# Altium PCB demo_dermis_main_testboard_scratch.PcbDoc (part 4 of 7)
Units mm, origin at the board's own origin, x right, y up, seen from the top; angles counter-clockwise.
Board outline 348.67 x 247.5 mm, 4 copper layers (Top Layer, Layer 1, Layer 2, Bottom Layer), stack 0.603 mm thick; 416 components, 288 nets, 1934 pads, 1690 vias.
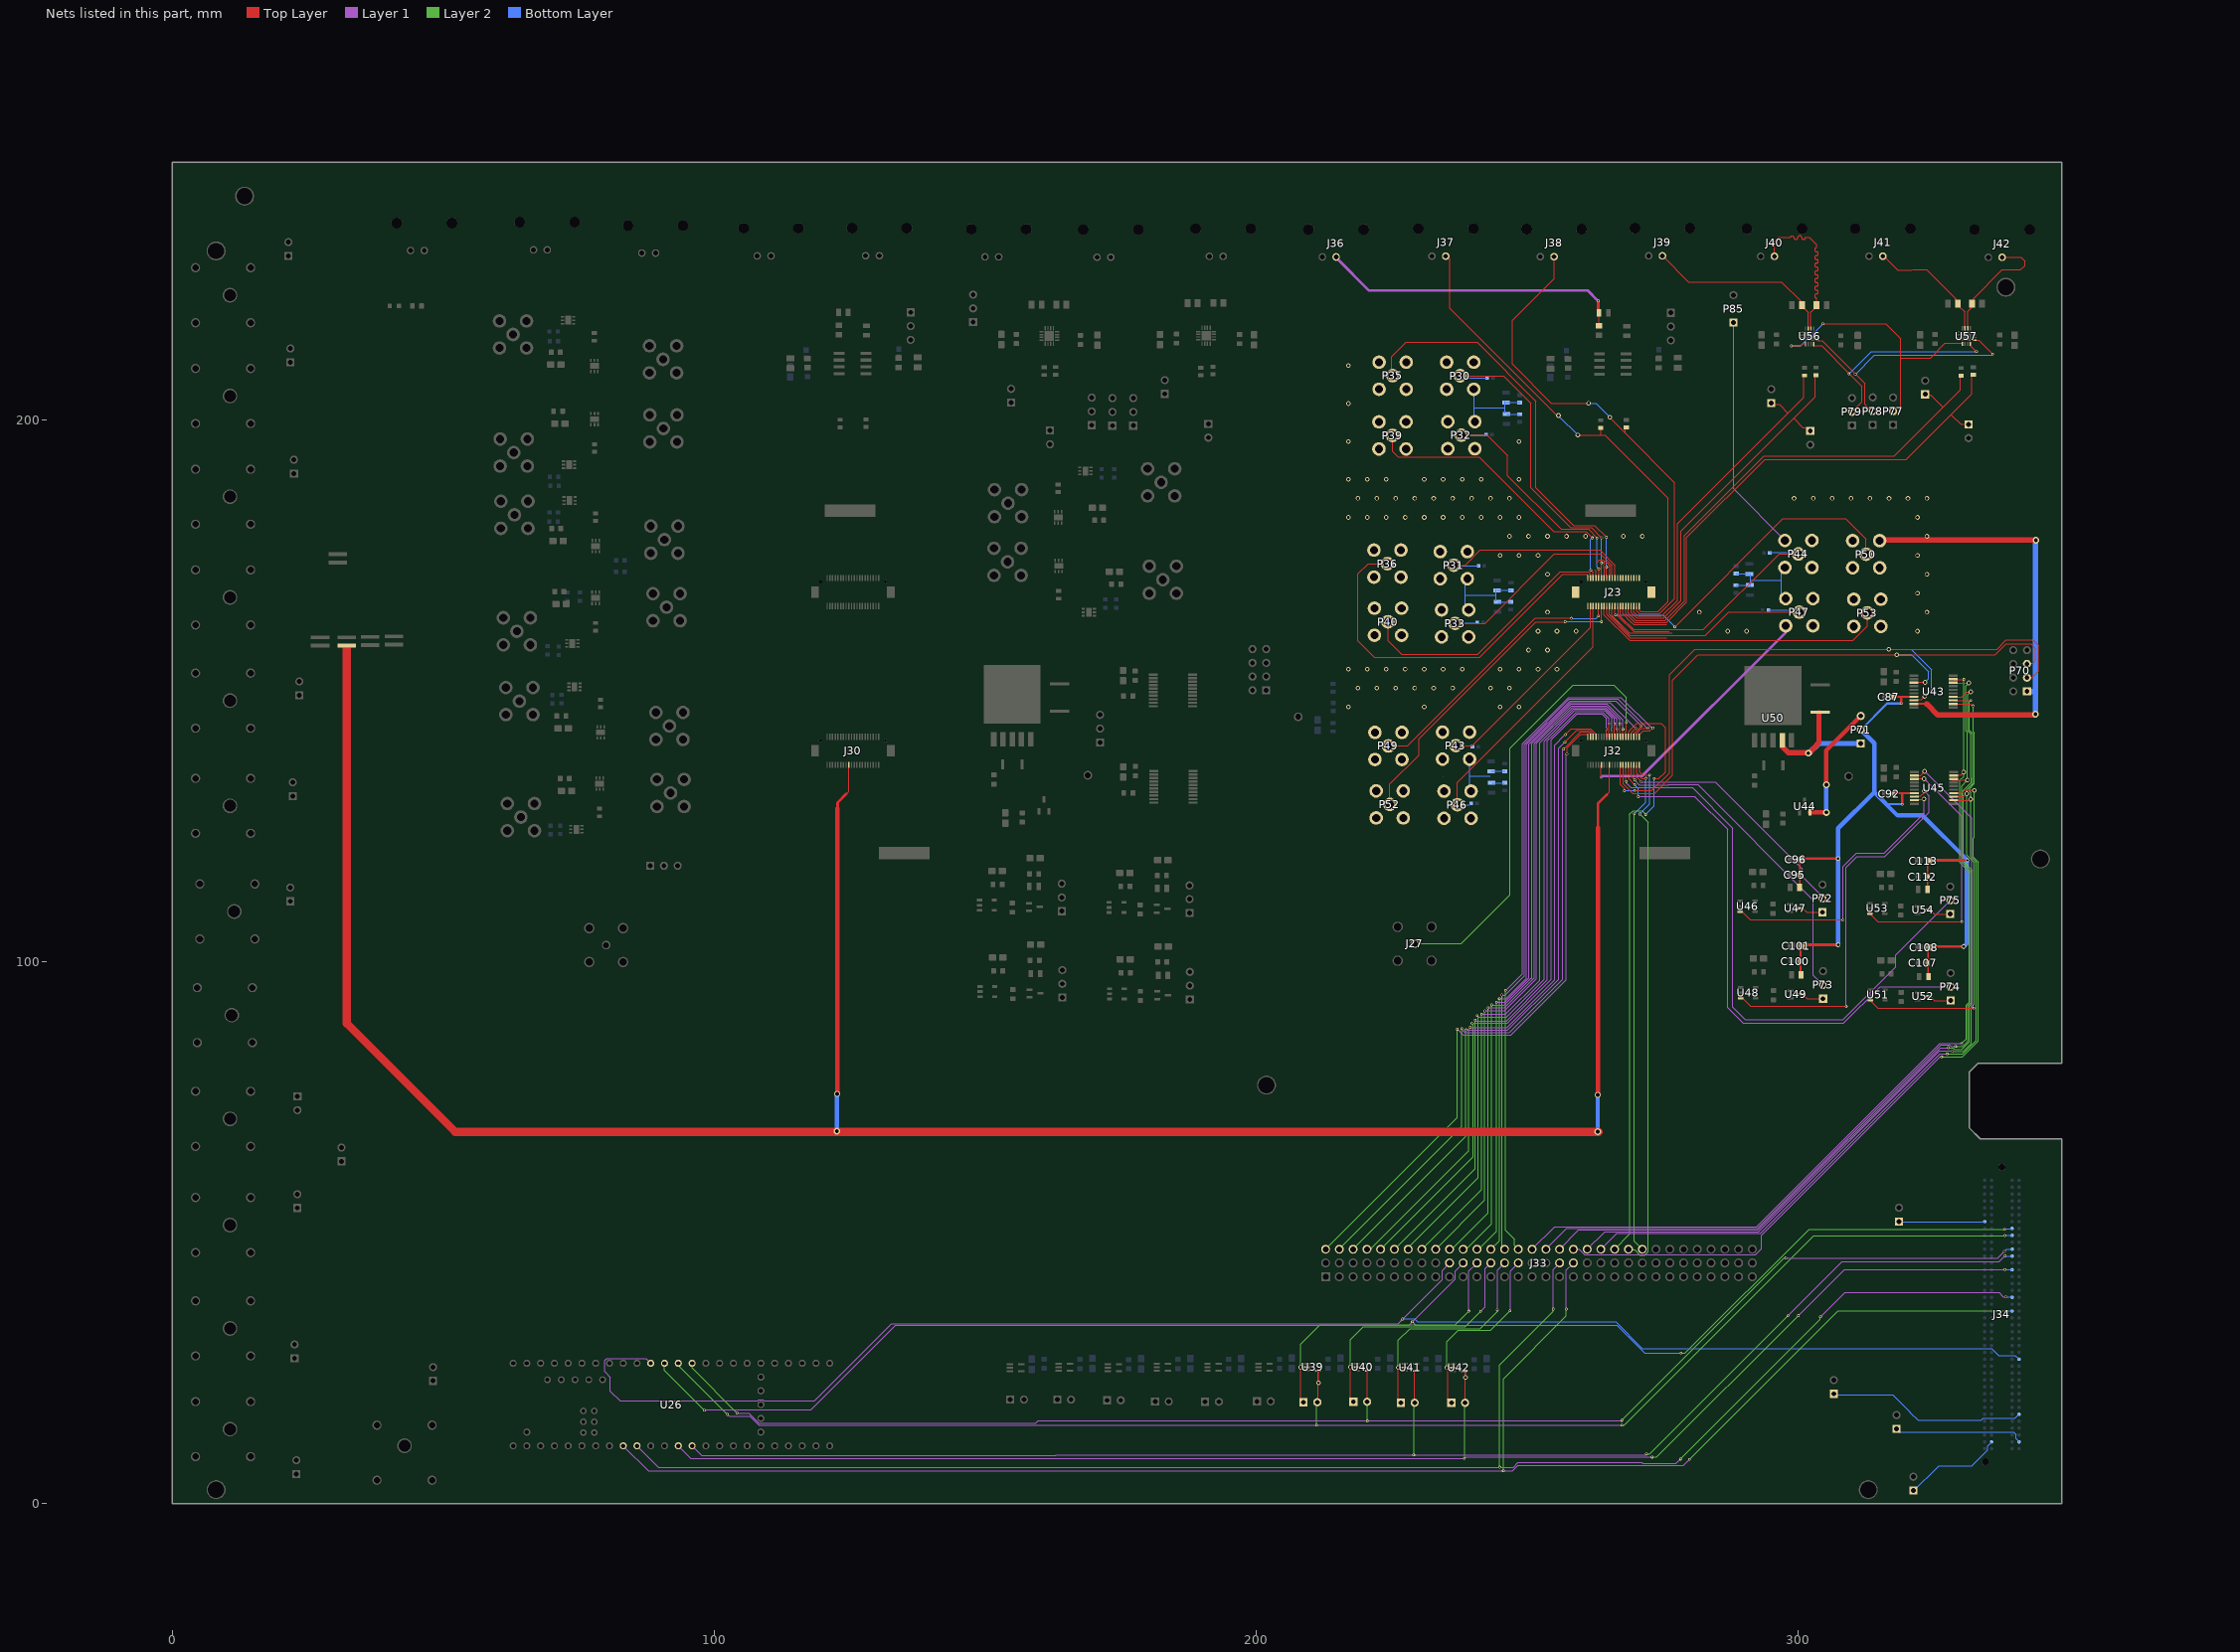
[diagram p5: the nets of this part, all layers, seen from the top]

## Via types
v1: diameter 0.85, hole 0.5, Top Layer to Bottom Layer, 1036 vias
v2: diameter 0.5, hole 0.3, Top Layer to Bottom Layer, 455 vias
v3: diameter 1.27, hole 0.711, Top Layer to Bottom Layer, 133 vias
v4: diameter 0.7, hole 0.4, Top Layer to Bottom Layer, 26 vias
v5: diameter 0.4, hole 0.25, Top Layer to Bottom Layer, 24 vias
v6: diameter 1.1, hole 0.7, Top Layer to Bottom Layer, 16 vias

## Nets (pads, with @x,y where several pads share a name; then routed paths per layer and width w, separated by ;. In a path a pad name is that pad's centre, name@x,y a point inside that pad or via, vN(x,y) a via of type N, cw(c..) or ccw(c..) an arc to the next point about the centre after c; other vN are vias at no path point) (continued)
CHIPB_A0: P79.2 U56.4 U57.4 | length 44.8
  Top Layer w0.2: U56.4@302.856,213.948 302.856,213.668 302.883,213.641 304.286,213.641 309.418,208.509 309.512,208.415 311.777,206.15 311.777,203.326 P79.2@309.929,201.478 ; U57.4@331.752,214.007 331.752,213.727 v2(332.896,212.583)
  Bottom Layer w0.2: v2(309.399,208.489) 309.64,208.73 313.492,212.583 v2(332.896,212.583)
CHIPB_A1: P78.2 U56.5 U57.5 | length 49.4
  Top Layer w0.2: U56.5@303.554,214.645 304.401,214.645 312.288,206.758 312.288,202.834 P78.2@313.74,201.383 ; U57.5@332.449,214.704 333.297,214.704 v2(335.877,212.124)
  Bottom Layer w0.2: v2(310.533,208.408) 314.029,211.904 335.657,211.904 v2(335.877,212.124)
CHIPB_A2: P77.2 U56.1 U57.1 | length 53
  Top Layer w0.2: v2(298.745,213.645) 300.558,213.645 300.926,214.012 301.356,214.012 U56.1@301.356,213.948 ; v2(304.564,217.706) 316.12,217.706 318.883,214.943 318.883,201.651 318.641,201.408 317.61,201.408 P77.2@317.591,201.389 ; 318.952,211.413 324.433,211.413 327.118,214.098 330.224,214.098 330.251,214.071 U57.1@330.251,214.007
  Bottom Layer w0.2: v2(298.745,213.645) 300.498,213.645 304.018,217.165 304.022,217.165 v2(304.564,217.706)
CHIPB_ACK: J32.37 J33.6 | length 122.2
  Top Layer w0.15: v2(256.735,139.25) 259.881,142.397 261.299,142.397 J32.37@261.73,141.966
  Layer 1 w0.15: v2(237.934,87.692) 237.934,87.598 238.175,87.357 238.175,87.204 238.482,86.896 246.68,86.896 246.819,87.036 256.577,96.793 256.577,139.133 v2@256.622,139.178
  Layer 2 w0.15: J33.6@215.344,46.943 215.344,47.008 237.934,69.598 v2(237.934,87.692)
CHIPB_ADDRX0: J32.25 J33.15 | length 127.2
  Top Layer w0.15: v5@264.632,142.912 264.632,141.39 J32.25@264.669,141.48
  Layer 1 w0.15: v2(239.829,88.642) 246.392,88.642 254.455,96.705 254.455,140.99 259.188,145.724 263.828,145.724 264.645,144.906 264.645,142.927 v5(264.647,142.927)
  Layer 2 w0.15: J33.15@222.964,46.943 240.029,64.007 240.029,88.443 v2(239.829,88.642)
CHIPB_ADDRY0: J32.23 J33.18 | length 126.8
  Top Layer w0.15: v5@265.121,143.943 265.121,141.379 J32.23@265.169,141.48
  Layer 1 w0.15: v2(240.398,89.22) 240.555,89.071 246.145,89.071 253.71,96.635 253.71,140.73 254.108,141.128 254.108,141.134 254.311,141.337 254.317,141.337 259.004,146.024 264.013,146.024 265.121,144.917 v5(265.121,143.944)
  Layer 2 w0.15: J33.18@225.504,46.943 240.398,61.837 v2(240.398,89.22)
CHIPB_AER_DIS: J32.21 J33.21 | length 126.8
  Top Layer w0.15: v5@265.607,142.91 265.607,141.386 J32.21@265.669,141.48
  Layer 1 w0.15: v2(240.797,90.048) 241.062,89.782 246.163,89.782 253.143,96.762 253.143,140.721 258.746,146.324 264.224,146.324 265.597,144.951 v5(265.597,142.921)
  Layer 2 w0.15: J33.21@228.044,46.943 228.044,47.257 240.923,60.136 240.923,89.921 v2(240.797,90.048)
CHIPB_CLK: J27.1 J32.11 | length 83.1
  Top Layer w0.2: J32.11@268.169,141.48 268.118,141.375 268.118,142.37 268.277,142.53 v5(268.277,144.152)
  Layer 2 w0.15: J27.1@229.238,103.307 237.803,103.307 246.811,112.315 246.811,139.377 258.464,151.03 265.959,151.03 268.277,148.712 v5(268.277,144.152)
CHIPB_CSb_IDAC: J33.57 U45.14 | length 144.2
  Top Layer w0.2: U45.14@328.236,131.1 U45.14@328.719,131.1 330.109,131.1 330.729,131.72 332.365,131.72 v1(332.468,131.617)
  Layer 1 w0.15: J33.57@258.524,46.943 259.579,46.943 260.629,45.893 292.103,45.893 293.225,47.014 293.225,49.538 326.124,82.437 v2(326.462,82.437)
  Layer 2 w0.15: v2(326.462,82.437) 330.3,82.437 333.254,85.391 333.254,118.399 332.333,119.32 332.333,122.807 332.518,122.992 332.518,131.567 v1(332.468,131.617)
CHIPB_CSb_VDAC: J33.54 U43.14 | length 161.7
  Top Layer w0.2: U43.14@328.871,148.899 328.884,148.885 330.213,148.885 331.127,149.799 v1(331.826,149.799)
  Layer 1 w0.15: J33.54@255.984,46.943 259.526,50.485 292.601,50.485 326.244,84.128 v2(327.728,84.128)
  Layer 2 w0.15: v2(327.728,84.128) 328.513,84.128 328.812,83.828 330.216,83.828 331.606,85.219 331.606,91.755 332.166,92.315 332.166,116.8 330.46,118.506 330.46,130.655 330.41,130.705 330.41,131.515 331.932,133.037 331.932,133.819 331.811,133.94 331.811,142.087 331.31,142.587 331.31,149.283 v1(331.826,149.799)
CHIPB_CT_MODE: J32.15 J33.30 | length 125
  Top Layer w0.15: v5@267.118,143.858 267.118,141.375 J32.15@267.169,141.48
  Layer 1 w0.15: v2(242.799,91.474) 245.804,91.474 251.314,96.984 251.314,140.296 258.242,147.224 264.597,147.224 267.089,144.732 v5(267.089,143.886)
  Layer 2 w0.15: J33.30@235.664,46.943 236.089,46.943 242.799,53.653 v2(242.799,91.474)
CHIPB_DIG_RES0: J32.7 J33.36 | length 125.3
  Top Layer w0.15: J32.7@269.168,141.426 269.168,142.219 v5(270.047,143.099)
  Layer 1 w0.15: v2@244.232,92.55 245.854,92.55 250.289,96.985 250.289,140.12 258.018,147.849 265.297,147.849 v5(270.047,143.099)
  Layer 2 w0.15: J33.36@240.744,46.943 241.044,46.943 244.344,50.242 v2(244.344,92.542)
CHIPB_DIG_RES1: J32.5 J33.39 | length 125.6
  Top Layer w0.15: J32.5@269.667,141.426 269.667,142.047 v5@271.026,143.405
  Layer 1 w0.15: v2@244.845,93.075 244.98,93.21 246.09,93.21 249.848,96.967 249.848,140.109 257.887,148.149 266.381,148.149 v5(271.026,143.504)
  Layer 2 w0.15: J33.39@243.284,46.943 244.869,48.527 v2(244.869,93.181)
CHIPB_DIG_RES2: J32.3 J33.42 | length 126.8
  Top Layer w0.15: J32.3@270.118,141.894 270.118,142.073 271.073,143.029 272.259,143.029 v5(272.314,143.083)
  Layer 1 w0.15: v2(245.317,93.855) 245.89,93.855 249.464,97.429 249.464,140.149 257.763,148.449 266.752,148.449 272.118,143.083 v5(272.314,143.083)
  Layer 2 w0.15: v2(245.317,93.855) 245.317,93.475 245.394,93.399 245.394,92.964 245.317,92.887 245.317,47.449 J33.42@245.824,46.943
CHIPB_DIG_RES3: J32.1 J33.45 | length 128.8
  Top Layer w0.15: J32.1@270.617,141.826 271.362,142.57 272.623,142.57 v2(273.2,143.146)
  Layer 1 w0.15: v2@245.928,94.581 249.093,97.747 249.093,140.203 257.639,148.749 267.32,148.749 272.922,143.146 v2(273.2,143.146)
  Layer 2 w0.15: v2(245.998,94.706) 245.998,50.388 247.614,48.771 247.614,47.693 J33.45@248.364,46.943
CHIPB_GAIN_HI: J32.13 J33.33 | length 124.6
  Top Layer w0.15: J32.13@267.645,141.403 v2@267.645,142.852
  Layer 1 w0.15: v2@243.415,92.08 243.478,92.017 245.746,92.017 250.687,96.958 250.864,96.958 250.864,140.27 258.143,147.549 264.696,147.549 267.619,144.626 267.619,142.932 v2(267.672,142.879)
  Layer 2 w0.15: J33.33@238.204,46.943 238.746,46.943 243.415,51.612 v2(243.415,92.025)
CHIPB_IBIAS: J32.12 P75.2 | length 110.7
  Top Layer w0.2: v2@268.228,133.301 J32.12@268.228,136.123
  Layer 1 w0.2: v2(268.276,133.253) 268.276,133.004 269.113,132.167 269.492,132.167 269.518,132.141 270.135,132.141 270.161,132.167 280.439,132.167 280.442,132.148 287.92,124.671 287.92,91.635 290.202,89.353 308.244,89.353 317.963,99.072 317.963,101.235 P75.2@328.058,111.33
CHIPB_IBIAS_ADAPT: J32.10 P74.2 | length 103.4
  Top Layer w0.2: J32.10@268.702,136.148 268.702,133.789 v2@269.761,132.73
  Layer 1 w0.2: v2(270.49,130.46) 280.926,130.46 280.929,130.441 286.954,124.417 286.954,91.518 289.84,88.632 308.409,88.632 315.159,95.381 P74.2@328.123,95.381
  Bottom Layer w0.2: v2(269.826,132.691) 269.826,132.61 270.49,131.946 v2(270.49,130.46)
CHIPB_IBIAS_ADAPT_PRE: P74.1 U52.3 | length 4.4
  Top Layer w0.2: U52.3@324.071,93.618 324.414,93.618 325.192,92.841 P74.1@328.123,92.841
CHIPB_IBIAS_AFE: J32.8 P73.2 | length 61.5
  Top Layer w0.2: J32.8@269.203,136.148 269.203,134.224 v2(269.86,133.566)
  Layer 1 w0.2: v2(269.86,133.566) 269.86,133.498 270.711,132.647 276.063,132.647 276.113,132.698 281.465,132.698 281.468,132.679 302.801,111.346 302.801,97.507 P73.2@304.593,95.715
CHIPB_IBIAS_AFE_PRE: P73.1 U49.3 | length 4.4
  Top Layer w0.2: U49.3@300.541,93.952 300.884,93.952 301.662,93.175 P73.1@304.593,93.175
CHIPB_IBIAS_PRE: P75.1 U54.3 | length 4.4
  Top Layer w0.2: U54.3@324.006,109.568 324.349,109.568 325.126,108.79 P75.1@328.058,108.79
CHIPB_IBIAS_SLEW: J32.6 P72.2 | length 59.9
  Top Layer w0.2: J32.6@269.702,136.148 269.702,134.502 270.998,133.206 v2(270.998,133.197)
  Layer 1 w0.2: v2(270.998,133.197) 283.955,133.197 ; v2@271.001,133.179 284.715,133.179 300.753,117.141 300.753,115.688 304.493,111.948 P72.2@304.493,111.666
CHIPB_IBIAS_SLEW_PRE: P72.1 U47.3 | length 4.4
  Top Layer w0.2: U47.3@300.44,109.903 300.783,109.903 301.56,109.126 P72.1@304.493,109.126
CHIPB_LDACb: J33.51 U43.18 U45.18 | length 167.6
  Top Layer w0.2: U45.18@328.341,133.548 331.213,133.548 v1(331.232,133.529) ; U45.18@328.686,133.667 U45.18@328.719,133.7 ; U43.18@328.865,151.513 328.968,151.41 331.456,151.41 v1(331.49,151.444)
  Layer 1 w0.15: J33.51@253.444,46.943 257.286,50.785 292.477,50.785 326.344,84.653 327.945,84.653 328.245,84.353 v2(329.029,84.353)
  Layer 2 w0.15: v2(329.029,84.353) 329.054,84.329 330.363,84.329 331.306,85.272 331.306,91.879 331.866,92.439 331.866,116.676 330.16,118.382 330.16,132.427 331.232,133.499 331.232,142.242 330.901,142.572 330.901,150.855 v1(331.49,151.444)
CHIPB_RATIOMODE0: J32.19 J33.24 | length 125.7
  Top Layer w0.15: v5@266.072,143.87 266.072,141.421 J32.19@266.169,141.48
  Layer 1 w0.15: v2(241.6,90.307) 246.013,90.307 252.304,96.598 252.304,140.372 258.556,146.624 264.348,146.624 266.104,144.869 v5(266.104,143.902)
  Layer 2 w0.15: J33.24@230.584,46.943 241.6,57.958 v2(241.6,90.307)
CHIPB_RATIOMODE1: J32.17 J33.27 | length 125.1
  Top Layer w0.15: v5@266.618,142.872 266.618,141.375 J32.17@266.669,141.48
  Layer 1 w0.15: v2(242.203,90.933) 245.814,90.933 251.71,96.829 251.71,140.268 258.366,146.924 264.473,146.924 266.578,144.818 266.578,142.974 v5(266.547,142.942)
  Layer 2 w0.15: J33.27@233.124,46.943 242.181,55.999 v2@242.181,90.933
CHIPB_REQOFF: J32.33 J33.12 | length 121
  Top Layer w0.15: v2(257.037,141.917) 258.126,143.006 261.69,143.006 J32.33@262.73,141.966
  Layer 1 w0.15: v2(239.504,87.889) 246.319,87.889 246.53,88.099 255.062,96.632 255.062,139.982 v2@256.925,141.845
  Layer 2 w0.15: J33.12@220.424,46.943 221.079,46.943 239.251,65.115 239.251,87.542 239.504,87.794 v2(239.504,87.889)
CHIPB_REQON: J32.35 J33.9 | length 120.7
  Top Layer w0.15: v2(256.958,140.503) 259.152,142.696 261.499,142.696 J32.35@262.23,141.966
  Layer 1 w0.15: v2(238.7,87.421) 238.758,87.364 246.412,87.364 255.82,96.771 255.82,139.404 v2@256.846,140.431
  Layer 2 w0.15: J33.9@217.884,46.943 238.7,67.758 v2(238.7,87.421)
CHIPB_RESETb: J33.48 U43.19 U45.19 | length 167.9
  Top Layer w0.15: U43.19@328.614,152.135 328.675,152.135 328.725,152.085 v2(330.586,152.085)
  Top Layer w0.2: U45.19@328.719,134.35 328.835,134.465 329.989,134.465 v1(330.53,135.006)
  Layer 1 w0.15: J33.48@250.904,46.943 255.046,51.085 292.337,51.085 326.155,84.902 330.097,84.902 v2(330.145,84.854)
  Layer 2 w0.15: v2(330.145,84.854) 330.145,84.919 331.006,85.78 331.006,92.003 331.566,92.563 331.566,116.551 329.86,118.257 329.86,133.542 330.53,134.212 v1(330.53,135.006) 330.558,135.034 330.558,152.057 v2(330.586,152.085)
CHIPB_RST: J32.39 J33.3 | length 123
  Top Layer w0.15: v2@257.384,138.377 257.384,139.476 259.857,141.949 J32.39@261.24,141.949
  Layer 1 w0.15: v2(237.098,87.547) 238.161,86.484 247.014,86.484 257.227,96.697 v2@257.227,138.259
  Layer 2 w0.15: J33.3@212.804,46.943 237.098,71.236 v2(237.098,87.547)
  other v2: 257.339,138.331
CHIPB_SCLK: J33.60 U43.13 U45.13 | length 157.6
  Top Layer w0.2: U45.13@328.255,130.504 330.498,130.504 330.989,130.995 v1(331.11,130.995) ; U43.13@328.868,148.252 328.934,148.186 328.97,148.223 v2(331.852,148.223)
  Layer 1 w0.15: J33.60@261.064,46.943 264.306,50.185 292.726,50.185 326.049,83.509 328.372,83.509 v2(328.396,83.484)
  Layer 2 w0.15: v2(328.396,83.484) 330.485,83.484 331.906,84.906 331.906,91.63 332.466,92.19 332.466,118.338 331.11,119.694 v1(331.11,130.995) 331.11,131.79 332.232,132.912 332.232,142.09 331.61,142.711 331.61,147.982 v2(331.852,148.223)
CHIPB_SDI: J33.63 U43.12 U45.12 | length 155.4
  Top Layer w0.2: U43.12@328.614,147.585 328.614,147.685 328.751,147.548 331.759,147.548 332.084,147.223 v2(332.26,147.223) ; U45.12@328.719,129.8 328.55,129.8 328.554,129.796 331.369,129.796 331.563,129.99 v1(331.818,129.99)
  Layer 1 w0.15: J33.63@263.604,46.943 266.546,49.885 293.046,49.885 326.144,82.984 v2(327.475,82.984)
  Layer 2 w0.15: v2(327.475,82.984) 327.499,82.959 330.384,82.959 332.856,85.432 332.856,118.372 331.818,119.411 v1(331.818,129.99) 331.818,131.277 331.674,131.421 331.674,132 332.532,132.858 332.532,142.143 332.26,142.415 v2(332.26,147.223)
CHIPB_VBIAS: U45.3 U53.3 | length 49
  Top Layer w0.15: U45.3@321.455,133.7 321.512,133.757 v1(323.241,133.757)
  Top Layer w0.2: U53.3@312.868,108.943 313.1,108.943 314.661,107.383 v2(330.189,107.383)
  Layer 1 w0.2: v1(323.241,133.757) 330.189,126.809 v2(330.189,107.383)
CHIPB_VBIAS_2P5V: C87.1 C92.1 C95.1 C96.1 C100.1 C101.1 C107.1 C108.1 C112.1 C113.1 P71.2 R30.1 R31.1 R33.1 R34.1 U43.7 U45.7 | length 156.4
  Top Layer w0.3: R30.1@300.326,114.221 300.326,118.727 C96.1@300.36,118.788 ; R31.1@300.427,97.769 C101.1@300.427,102.776 ; R34.1@323.891,113.886 323.891,118.392 C113.1@323.926,118.453 ; R33.1@323.957,97.259 C108.1@323.957,102.442
  Top Layer w0.4: C87.1@317.594,148.852 317.594,148.9 319.029,148.9 ; C92.1@317.66,131.1 319.194,131.1 ; v2(319.021,147.634) 319.021,148.893 319.029,148.9 ; v2(319.194,129.056) 319.194,131.1 ; U45.7@321.455,131.1 319.194,131.1 ; U43.7@321.605,148.9 319.029,148.9
  Top Layer w0.5: C96.1@300.36,118.788 300.643,119.071 300.675,119.038 300.701,119.013 v1(307.364,119.013) ; C101.1@300.461,102.837 300.591,102.967 300.744,103.119 300.75,103.113 v1(307.386,103.113) ; C113.1@323.926,118.453 324.208,118.736 324.215,118.729 331.156,118.729 v4(331.195,118.69) ; C108.1@323.991,102.503 324.121,102.634 324.274,102.786 324.28,102.78 324.283,102.777 v1(330.525,102.777)
  Bottom Layer w0.4: P71.2@311.555,142.809 316.38,147.634 v2(319.021,147.634) ; 314.036,131.509 316.489,129.056 v2(319.194,129.056)
  Bottom Layer w0.8: v1@307.361,103.064 307.361,124.621 314.036,131.296 ; P71.2@311.555,142.809 314.036,140.328 314.036,131.509 314.036,131.296 ; v1(330.525,102.777) 330.525,102.791 331.134,103.4 v4@331.134,118.69 ; v4@331.134,118.788 322.931,126.992 318.34,126.992 314.036,131.296
CHIPB_VBIAS_ADAPT: U45.2 U51.3 | length 69.7
  Top Layer w0.2: U51.3@312.934,92.994 313.166,92.994 314.726,91.433 v5(332.381,91.433) ; U45.2@321.455,134.35 321.488,134.383 322.575,134.383 v1(323.327,135.135)
  Layer 1 w0.2: v1(323.327,135.135) 332.041,126.42 332.041,91.773 v5(332.381,91.433)
CHIPB_VBIAS_AFE: U45.8 U48.3 | length 71.9
  Top Layer w0.2: U48.3@289.404,93.328 289.636,93.328 291.196,91.767 v2(308.851,91.767) ; U45.8@321.455,130.45 321.566,130.561 322.575,130.561 323.277,131.264 v1(323.277,131.49)
  Layer 1 w0.2: v2(308.851,91.767) 308.851,117.345 310.882,119.375 315.947,119.375 324.134,127.562 324.134,130.633 v1(323.277,131.49)
CHIPB_VBIAS_SLEW: U45.9 U46.3 | length 52.9
  Top Layer w0.2: U46.3@289.303,109.279 289.535,109.279 291.095,107.719 v2(308.247,107.719) ; U45.9@321.455,129.8 321.57,129.915 323.072,129.915 v1(323.195,130.039)
  Layer 1 w0.2: v2@308.265,107.719 308.265,117.589 310.745,120.068 315.848,120.068 323.195,127.416 v1(323.195,130.039)
CHIPB_VCM: J23.1 J23.3 J23.5 J23.7 J23.9 J23.11 J23.13 J23.14 J23.15 J23.17 J23.18 J23.22 J23.23 J23.26 J23.27 J23.33 J23.34 J23.40 J23.S1 J23.S2 J32.30 P30.2 P31.2 P32.2 P33.2 P35.2 P36.2 P39.2 P40.2 P43.2 P44.2 P46.2 P47.2 P49.2 P50.2 P52.2 P53.2 P70.1 P85.1 R69.1 R70.2 R71.2 R72.1 R73.1 R74.2 R75.2 R76.1 R77.1 R78.2 R79.2 R80.1 R81.1 R82.2 R83.2 R84.1 U43.9 | length 311.1
  Top Layer w0.15: 262.392,172.338 262.653,172.078 262.653,170.817 J23.33@262.67,170.799 ; 262.771,173.583 263.314,174.125 263.952,174.125 264.149,173.928 264.209,173.928 ; 263.648,134.548 263.648,134.032 v5(263.654,134.025) ; J32.30@263.648,136.309 J32.30@263.669,136.33 ; J23.27@264.17,170.799 264.209,170.839 264.209,172.533 264.12,172.623 264.12,173.243 264.259,173.383 264.259,173.878 264.209,173.928 ; J23.26@264.67,165.649 264.67,164.11 268.985,159.795 275.673,159.795 ; J23.23@265.17,170.799 265.218,170.847 265.218,173.01 264.299,173.928 264.209,173.928 ; J23.22@265.67,165.649 265.67,163.874 268.883,160.661 276.701,160.661 ; J23.18@266.67,165.649 266.85,165.47 266.85,163.693 269.628,160.915 276.134,160.915 ; J23.14@267.67,165.649 267.67,164.211 269.145,162.736 ; 269.145,162.736 269.671,162.209 275.672,162.209
  Top Layer w0.2: 263.648,134.548 J32.30@263.648,136.309
  Top Layer w0.4: U43.9@321.72,147.59 323.697,147.59
  Top Layer w1: P50.2@314.938,177.808 v3(343.862,177.808) ; 323.697,147.59 325.751,145.535 v3@343.505,145.535
  Layer 1 w0.15: P85.1@288.053,217.946 288.053,187.227 P44.2@297.54,177.739
  Layer 1 w0.5: v5(263.654,134.025) 263.895,134.266 271.223,134.266 297.707,160.75 P47.2@297.707,161.997
  Bottom Layer w0.15: P43.2@234.371,137.372 P43.2@234.509,137.234 ; 234.503,134.06 234.509,134.065 ; P46.2@234.509,131.607 P46.2@234.647,131.469 ; P33.2@238.614,165.116 238.614,167.615 ; P31.2@238.614,170.887 238.614,167.615 ; P31.2@238.958,170.677 P31.2@239.079,170.556 ; P33.2@239.079,165.054 P33.2@239.2,164.933 ; P46.2@239.375,131.793 239.375,134.293 ; P43.2@239.375,137.564 239.375,134.293 ; P30.2@240.144,205.636 240.245,205.535 240.245,202.263 ; P32.2@240.347,199.662 240.245,199.763 240.245,202.263 ; 243.171,134.293 239.375,134.293 ; R78.2@243.366,135.155 R77.1@245.884,135.155 ; R79.2@243.487,132.992 R80.1@245.853,132.992 ; R75.2@244.287,166.543 244.287,167.615 ; R74.2@244.287,168.753 244.287,167.615 ; R74.2@244.483,168.541 R73.1@247.001,168.541 ; R75.2@244.603,166.378 R76.1@246.97,166.378 ; R70.2@245.904,203.415 245.919,203.4 245.919,202.263 ; R71.2@245.919,201.191 245.919,202.263 ; R70.2@246.089,203.164 246.114,203.189 R69.1@248.632,203.189 ; R71.2@246.173,201.087 246.235,201.026 R72.1@248.601,201.026 ; R84.1@288.531,169.468 R83.2@291.049,169.468 ; R81.1@288.562,171.631 R82.2@290.928,171.631 ; R83.2@291.244,169.257 291.244,170.394 ; R82.2@291.244,171.466 291.244,170.394 ; P47.2@296.918,167.122 296.918,170.394 ; P44.2@296.918,172.894 296.918,170.394 ; P44.2@297.54,172.74 P44.2@297.624,172.656 ; P47.2@297.624,167.081 P47.2@297.707,166.997 ; 238.614,167.615 244.287,167.615 ; 240.245,202.263 245.919,202.263 ; 291.244,170.394 296.918,170.394
  Bottom Layer w1: P70.1@342.216,149.874 342.267,149.824 343.775,149.824 ; v3(343.775,145.663) 343.775,149.824 ; v3@343.775,177.808 343.775,149.824
  other v1: 217,147 231,147 245,147 248.5,147 218.75,150.5 222.25,150.5 225.75,150.5 229.25,150.5 232.75,150.5 236.25,150.5 243.25,150.5 246.75,150.5 217,154 220.5,154 224,154 227.5,154 231,154 234.5,154 238,154 245,154 248.5,154 252,154 255.5,154 250.25,157.5 253.75,157.5 252,161 255.5,161 259,161 287,161 290.5,161 322,161 253.75,164.5 281.75,164.5 323.75,164.5 322,168 253.75,171.5 323.75,171.5 245,175 248.5,175 252,175 322,175 246.75,178.5 250.25,178.5 253.75,178.5 257.25,178.5 260.75,178.5 267.75,178.5 271.25,178.5 323.75,178.5 217,182 220.5,182 224,182 227.5,182 231,182 234.5,182 238,182 241.5,182 245,182 248.5,182 322,182 218.75,185.5 222.25,185.5 225.75,185.5 229.25,185.5 232.75,185.5 236.25,185.5 239.75,185.5 243.25,185.5 246.75,185.5 299.25,185.5 302.75,185.5 306.25,185.5 309.75,185.5 313.25,185.5 316.75,185.5 320.25,185.5 323.75,185.5 217,189 220.5,189 224,189 231,189 234.5,189 238,189 241.5,189 248.5,189 217,196 248.5,196 217,203 217,210
CHIPB_VD: J32.4 J33.72 | length 91.8
  Top Layer w0.2: J32.4@270.203,136.148 270.203,134.797 271.169,133.831 v2(271.902,133.831)
  Layer 2 w0.2: v2(269.762,127.3) 269.762,48.404 J33.72@271.224,46.943
  Bottom Layer w0.2: v2(269.762,127.3) 271.902,129.439 v2(271.902,133.831)
CHIPB_VDD_2P5V: C104.1 P71.1 U50.4 | length 25.4
  Top Layer w0.2: U50.4@296.891,140.072 U50.4@296.891,141.65
  Top Layer w1: U50.4@297.087,139.657 298.142,138.602 301.865,138.544 302.111,138.54 303.825,140.474 C104.1@303.825,145.868
  Bottom Layer w1: v3@301.928,138.409 303.789,140.269 P71.1@311.555,140.269
  other v3: 301.864,138.473
CHIPB_VG: J32.2 J33.69 | length 96.9
  Top Layer w0.2: J32.2@270.728,136.123 270.728,135.006 271.295,134.438 v2(272.616,134.438)
  Layer 2 w0.2: J33.69@268.684,46.943 268.789,46.837 269.809,46.837 270.779,45.868 271.669,45.868 272.299,46.497 272.299,125.702 v2(270.746,127.255)
  Bottom Layer w0.2: v2(270.746,127.255) 272.616,129.125 v2(272.616,134.438)
CHIPB_VIN_SINGLEEND_OTA: J36.2 R38.2 R41.1 | length 55.9
  Top Layer w0.2: R38.2@263.245,217.333 R41.1@263.245,220.242
  Top Layer w0.5: R41.1@263.106,220.382 v2(263.106,221.92)
  Layer 1 w0.5: J36.2@214.904,229.8 220.862,223.842 260.961,223.842 ; 261.159,223.867 v2(263.106,221.92)
  Bottom Layer w0.5: J36.2@214.904,229.8 J36.2@214.904,229.982
CHIPB_VINN_REPLICA: J23.4 J38.2 R35.2 | length 100.3
  Top Layer w0.15: 254.672,203.072 v1(261.339,203.072) ; J38.2@254.957,230.1 254.957,226.103 247.253,218.398 247.253,210.269 254.475,203.047 v1@261.14,203.047
  Top Layer w0.2: v1(265.258,200.491) 265.258,200.355 268.112,197.501 ; R35.2@268.112,198.397 268.112,197.501 ; J23.4@270.17,165.649 270.17,164.736 270.701,164.205 274.464,164.205 277.227,166.969 277.227,188.386 268.112,197.501
  Bottom Layer w0.15: v1(261.339,203.072) 262.678,203.072 v1(265.258,200.491)
CHIPB_VINN_X0: J23.20 P50.1 | length 61.5
  Top Layer w0.15: J23.20@266.17,165.649 266.17,164.212 266.325,164.057 v2(266.325,163.962) ; v2(277.244,161.798) 297.216,181.77 308.651,181.77 308.734,181.77 312.538,177.966 P50.1@312.538,175.198
  Bottom Layer w0.15: v2(266.325,163.962) 275.08,163.962 v2(277.244,161.798)
CHIPB_VINN_X1: J23.39 P36.1 | length 69.3
  Top Layer w0.15: P36.1@224.22,173.463 220.653,173.463 218.746,171.556 218.746,159.241 221.82,156.167 241.243,156.167 256.54,171.463 261.169,171.463 J23.39@261.17,170.799
CHIPB_VINN_Y0: J23.32 P49.1 | length 50.9
  Top Layer w0.15: P49.1@224.4,139.813 227.941,139.813 251.532,163.404 258.146,163.404 v2(258.146,163.362) v2@258.247,163.362 ; v2@263.111,163.611 263.111,165.563 J23.32@263.17,165.649
  Bottom Layer w0.15: v2(258.146,163.362) 262.681,163.362 v2(263.134,163.815)
CHIPB_VINN_Y1: J23.25 P35.1 | length 76.2
  Top Layer w0.15: P35.1@225.176,208.141 225.033,208.284 225.033,211.669 227.646,214.282 240.754,214.282 251.629,203.408 ; 251.629,203.597 251.629,203.408 ; v2(264.612,178.334) 262.442,180.504 258.605,180.504 251.629,187.48 251.629,203.408 ; v2(264.645,172.84) 264.657,172.828 264.657,170.812 J23.25@264.67,170.799
  Bottom Layer w0.15: v2(264.645,172.84) 264.629,172.856 264.629,178.172 264.746,178.29 v2@264.753,178.29
CHIPB_VINP_REPLICA: J23.2 J37.2 R36.2 | length 91.6
  Top Layer w0.15: J37.2@235.285,230.074 235.712,229.646 235.712,220.685 235.68,220.653
  Top Layer w0.2: 235.68,220.653 v1@255.57,200.763 ; v1(259.348,197.208) 263.59,197.208 ; R36.2@263.537,198.538 263.59,198.486 263.59,197.208 ; J23.2@270.67,165.649 270.67,164.927 270.976,164.62 274.176,164.62 275.967,166.412 275.967,185.543 264.302,197.208 263.59,197.208
  Bottom Layer w0.2: v1(255.768,200.788) v1(259.348,197.208)
CHIPB_VINP_X0: J23.28 P53.1 | length 55.8
  Top Layer w0.15: J23.28@264.17,165.649 264.177,165.642 264.177,163.971 268.884,159.264 310.08,159.264 312.755,161.939 P53.1@312.755,164.38
CHIPB_VINP_X1: J23.37 P40.1 | length 49.2
  Top Layer w0.15: P40.1@224.318,162.733 224.318,159.181 226.805,156.694 240.851,156.694 256.135,171.978 261.292,171.978 261.62,171.65 261.62,170.849 J23.37@261.669,170.799
CHIPB_VINP_Y0: J23.30 P52.1 | length 59.9
  Top Layer w0.15: P52.1@224.641,129.023 224.641,132.754 230.002,138.114 230.002,141.109 251.617,162.724 v2(257.015,162.724) ; J23.30@263.682,165.637 263.682,162.767 v2(263.695,162.755)
  Bottom Layer w0.15: v2(257.015,162.724) 257.031,162.739 263.679,162.739 v2(263.695,162.755)
CHIPB_VINP_Y1: J23.35 P39.1 | length 54.2
  Top Layer w0.15: P39.1@225.156,197.122 225.156,194.188 226.179,193.165 226.179,193.147 241.14,193.147 254.877,179.411 260.867,179.411 v2(262.057,178.221) ; v2(261.721,172.296) 262.169,171.848 J23.35@262.169,170.799
  Bottom Layer w0.15: v2(261.721,172.296) 261.721,177.885 262.057,178.22 v2(262.057,178.221)
CHIPB_VN_X0: C140.2 J23.16 P44.1 | length 46.1
  Top Layer w0.15: J23.16@267.17,165.649 267.169,163.727 269.624,161.273 282.526,161.273 296.493,175.239 P44.1@300.04,175.239
  Bottom Layer w0.15: C140.2@294.831,175.495 P44.1@299.316,175.495
CHIPB_VN_X1: C136.2 J23.19 P31.1 | length 38.5
  Top Layer w0.15: P31.1@236.458,173.177 238.544,173.177 241.316,175.95 263.402,175.95 266.169,173.182 J23.19@266.169,171.288
  Bottom Layer w0.15: P31.1@236.41,173.091 C136.2@241.014,173.091
CHIPB_VN_Y0: C138.2 J23.38 P43.1 | length 40.9
  Top Layer w0.15: P43.1@236.87,139.873 239.879,139.873 261.669,161.663 J23.38@261.669,165.649
  Bottom Layer w0.15: P43.1@236.87,139.873 239.729,139.873 C138.2@239.897,139.705
CHIPB_VN_Y1: C134.2 J23.29 P30.1 | length 60.3
  Top Layer w0.15: P30.1@237.644,208.136 245.595,208.136 250.693,203.038 250.693,187.469 258.04,180.122 261.856,180.122 v2(263.746,178.232) ; J23.29@263.67,170.799 263.672,170.891 263.658,170.905 263.734,170.981 v2(263.734,173.6)
  Bottom Layer w0.15: P30.1@237.644,208.136 238.042,207.738 C134.2@242.645,207.738 ; v2@263.672,178.232 263.672,173.662 v2(263.734,173.6)
CHIPB_VOUTN_REPLICA: J23.6 P87.1 R42.2 | length 65
  Top Layer w0.2: J23.6@269.67,165.649 269.67,164.567 270.44,163.797 274.829,163.797 277.712,166.68 277.712,180.847 298.112,201.248 ; P87.1@295.655,202.828 296.533,202.828 298.112,201.248 ; R42.2@301.163,208.185 301.049,208.071 301.049,204.185 298.112,201.248
CHIPB_VOUTN_REPLICA_INAMP: C124.2 J40.2 U56.10 | length 33.7
  Top Layer w0.2: J40.2@295.616,230.167 295.594,230.189 295.594,231.099 295.594,231.431 295.594,232.139 295.594,232.847 296.388,233.641 297.093,233.641 297.801,233.641 298.509,233.641 cw(c298.863,233.508) 299.217,233.641 ccw(c299.571,233.641) 299.925,233.641 cw(c300.279,233.641) 300.633,233.641 ccw(c300.986,233.641) 301.34,233.641 302.048,233.641 303.379,232.31 303.379,231.717 ccw(c303.379,231.363) 303.379,231.009 cw(c303.379,230.655) 303.379,230.301 ccw(c303.379,229.947) 303.379,229.593 cw(c303.379,229.239) 303.379,228.885 ccw(c303.379,228.531) 303.379,228.177 cw(c303.379,227.823) 303.379,227.469 ccw(c303.379,227.115) 303.379,226.761 cw(c303.379,226.407) 303.379,226.053 ccw(c303.379,225.699) 303.379,225.345 cw(c303.379,224.991) 303.379,224.637 ccw(c303.379,224.283) 303.379,223.929 cw(c303.379,223.575) 303.379,223.221 ccw(c303.379,222.867) 303.379,222.513 C124.2@303.379,221.162 ; U56.10@302.356,216.843 302.356,219.956 302.364,219.956 C124.2@303.379,220.971
CHIPB_VOUTN_X0: J23.10 P86.1 R44.2 | length 95
  Top Layer w0.2: J23.10@268.67,165.649 268.67,164.355 270.073,162.952 275.403,162.952 279,166.549 279,178.684 293.651,193.334 317.726,193.334 326.698,202.307 ; P86.1@323.422,204.707 323.503,204.626 324.379,204.626 326.698,202.307 ; R44.2@330.059,208.162 330.059,208.244 329.945,208.13 329.945,205.554 326.698,202.307
CHIPB_VOUTN_X0_INAMP: C130.2 J42.2 U57.10 | length 22.4
  Top Layer w0.15: C130.2@332.272,221.828 332.272,222.344 337.624,227.696 341.046,227.696 341.798,228.447 341.798,229.295 341.104,229.988 J42.2@337.624,229.988
  Top Layer w0.2: U57.10@331.252,216.902 331.252,220.015 331.26,220.015 C130.2@332.275,221.03
CHIPB_VOUTP_REPLICA: J23.8 P84.1 R43.2 | length 68.2
  Top Layer w0.2: J23.8@269.17,165.649 269.17,164.448 270.229,163.389 275.138,163.389 278.38,166.631 278.38,179.492 299.154,200.266 ; P84.1@302.23,197.941 301.58,198.591 300.83,198.591 299.154,200.266 ; R43.2@303.26,208.257 303.146,208.143 303.146,204.258 299.154,200.266
CHIPB_VOUTP_REPLICA_INAMP: C121.1 J39.2 U56.11 | length 34.4
  Top Layer w0.2: J39.2@274.948,230.256 279.736,225.468 279.736,225.467 296.936,225.467 300.691,221.711 C121.1@300.691,221.185 ; C121.1@300.691,220.995 301.856,219.83 U56.11@301.856,216.843
CHIPB_VOUTP_X0: J23.12 P83.1 R45.2 | length 97.9
  Top Layer w0.2: J23.12@268.17,165.649 268.17,164.276 269.845,162.602 275.672,162.602 279.414,166.344 279.414,178.246 293.836,192.668 319.88,192.668 328.18,200.968 ; P83.1@331.438,199.17 329.977,199.17 328.18,200.968 ; R45.2@332.155,208.317 332.041,208.202 332.041,204.829 328.18,200.968
CHIPB_VOUTP_X0_INAMP: C125.1 J41.2 U57.11 | length 22.3
  Top Layer w0.2: J41.2@315.755,230.208 318.367,227.595 320.972,227.595 321.07,227.694 323.672,227.694 329.093,222.273 329.093,221.85 C125.1@329.477,221.466 ; C125.1@329.587,221.054 330.751,219.889 U57.11@330.751,216.902
CHIPB_VP_X0: C141.2 J23.24 P47.1 | length 44.6
  Top Layer w0.15: J23.24@265.17,165.649 265.17,164.021 268.963,160.228 282.908,160.228 287.177,164.498 P47.1@300.207,164.498
  Bottom Layer w0.15: C141.2@294.518,164.918 P47.1@299.121,164.918
CHIPB_VP_X1: C137.2 J23.21 P33.1 | length 41.5
  Top Layer w0.15: P33.1@236.7,162.432 242.194,162.432 254.994,175.232 263.545,175.232 264.905,173.871 265.627,173.15 J23.21@265.627,171.261
  Bottom Layer w0.15: P33.1@236.216,162.514 C137.2@240.701,162.514
CHIPB_VP_Y0: C139.2 J23.36 P46.1 | length 49.7
  Top Layer w0.15: P46.1@237.146,128.969 237.146,133.063 262.169,158.085 J23.36@262.169,165.649
  Bottom Layer w0.15: P46.1@237.146,128.969 239.426,128.969 C139.2@239.661,129.205
CHIPB_VP_Y1: C135.2 J23.31 P32.1 | length 47.2
  Top Layer w0.15: P32.1@237.847,197.162 242.64,197.162 246.407,193.394 246.407,189.693 256.293,179.808 261.29,179.808 v2(262.895,178.203) ; J23.31@263.17,170.799 263.128,170.841 263.209,170.923 v2(263.209,172.506)
  Bottom Layer w0.15: P32.1@237.847,197.162 242.332,197.162 C135.2@242.409,197.239 ; v2(262.895,178.203) 262.895,172.862 263.209,172.548 v2(263.209,172.506)
CHIPB_VREF_2P5V: P71.3 U44.2 | length 23.5
  Top Layer w0.8: U44.2@302.148,127.554 v3(305.174,127.554) ; v3(305.174,132.669) 305.174,138.968 P71.3@311.555,145.349
  Bottom Layer w0.8: v3(305.174,127.554) v3(305.174,132.669)
CHIPB_VS: J32.9 J33.66 | length 111.9
  Top Layer w0.2: J32.9@268.737,141.332 268.737,142.495 270.245,144.004 274.686,144.004 275.528,143.162 275.528,135.035 274.293,133.8 v2(273.426,133.8)
  Layer 2 w0.2: J33.66@266.144,46.943 268.855,49.653 268.854,127.17 269.535,127.85 271.18,127.85 v2(271.864,127.166)
  Bottom Layer w0.2: v2(271.864,127.166) 273.426,128.727 v2(273.426,133.8)
CHIPB_VTRIG_COMP: J32.14 P70.5 U43.3 | length 117.4
  Top Layer w0.15: U43.3@321.662,151.558 v1(323.391,151.558)
  Top Layer w0.2: J32.14@267.707,136.145 267.707,132.793 269.459,131.041 273.483,131.041 276.857,134.416 276.857,151.976 281.539,156.659 ; 281.542,156.64 v1(318.165,156.64) 336.348,156.64 338.32,158.612 342.908,158.612 343.807,157.713 343.807,155.599 343.267,155.059 342.321,155.059 P70.5@342.216,154.954
  Bottom Layer w0.15: v1(318.165,156.64) 320.932,156.64 324.077,153.496 324.077,152.243
  Bottom Layer w0.2: v1(323.391,151.558) 324.077,152.243
CHIPB_VTUNE_PSEUDO: J32.16 P70.3 U43.8 | length 127.8
  Top Layer w0.2: J32.16@267.203,136.148 267.203,132.718 267.94,131.98 v2(267.94,131.565) ; v2(269.84,131.591) 272.99,131.591 276.249,134.85 276.249,152.96 280.971,157.682 336.68,157.682 338.391,159.393 343.286,159.393 344.32,158.358 344.32,153.64 343.094,152.414 P70.3@342.216,152.414 ; U43.8@321.716,148.362 322.725,148.362 v1(323.345,148.982)
  Bottom Layer w0.2: v2@267.953,131.578 v2@269.827,131.578 ; v1(316.734,157.64) 320.85,157.64 321.152,157.339 324.565,153.926 324.565,150.202 v1(323.345,148.982)
CSb_IDAC: J33.56 J34.D20 U26.18 | length 314.1
  Layer 1 w0.15: U26.18@83.225,10.65 87.837,6.038 v2@245.635,6.038 ; v2(245.603,6.065) 247.241,6.065 248.262,7.086 251.665,7.086 251.678,7.073 278.878,7.073 v2(279.949,8.143) ; v2(257.216,35.895) 257.216,43.095 J33.56@258.524,44.403
  Layer 2 w0.15: v2(245.603,6.065) 245.603,23.003 257.216,34.616 v2(257.216,35.895) ; v2(279.949,8.143) 307.336,35.531 v2(338.34,35.531)
  Bottom Layer w0.15: v2(338.34,35.531) 338.343,35.528 339.473,35.528 J34.D20@339.476,35.526
CSb_VDAC: J33.53 J34.D18 U26.17 | length 311.7
  Layer 1 w0.15: U26.17@85.765,10.65 89.702,6.713 v2(244.942,6.713) 247.465,6.713 248.313,7.561 271.144,7.561 271.332,7.372 277.442,7.372 v2(278.282,8.212) ; v2(254.804,35.895) 254.804,43.223 J33.53@255.984,44.403 ; v2(304.113,34.491) 304.159,34.491 308.62,38.953 337.073,38.953 337.841,38.185 v2(338.3,38.185)
  Layer 2 w0.15: v2(244.942,6.713) 244.942,25.612 254.804,35.474 v2(254.804,35.895) ; v2(278.282,8.212) 304.086,34.016 304.086,34.463 v2(304.113,34.491)
  Bottom Layer w0.15: v2(338.3,38.185) 338.36,38.126 339.416,38.126 J34.D18@339.476,38.066
CT_MODE: J33.29 J34.C27 U26.9 | length 299.9
  Layer 1 w0.15: U26.9@88.305,25.89 87.426,26.769 80.195,26.769 79.806,26.38 79.806,24.383 80.865,23.324 80.865,20.748 82.639,18.974 108.086,18.974 108.261,19.149 108.99,19.149 109.165,18.974 118.492,18.974 132.738,33.219 226.158,33.219 226.426,33.488 ; v2(227.001,34.063) 226.426,33.488 ; J33.29@235.664,44.403 234.309,43.047 234.309,41.37 226.426,33.488
  Bottom Layer w0.15: v2(227.001,34.063) 229.247,34.063 229.76,33.55 266.339,33.55 271.257,28.631 335.711,28.631 336.981,27.361 340.021,27.361 J34.C27@340.746,26.636
DGND: J30.24 J32.24 R17.2 | length 445.6
  Top Layer w0.2: 124.368,130.957 124.836,131.424 J30.24@124.836,136.465 ; 264.701,130.822 265.169,131.29 J32.24@265.169,136.33
  Top Layer w0.5: 122.702,128.24 122.766,128.303 122.766,129.354 124.368,130.957 ; 263.035,124.736 263.035,129.156 264.701,130.822
  Top Layer w0.8: v6(122.702,75.586) 122.702,128.24 ; v6(263.035,75.452) 263.035,124.736
  Top Layer w1.5: 32.222,157.768 32.222,88.584 52.206,68.601 v3@263.226,68.601
  Bottom Layer w0.5: v3@122.675,68.83 v3@122.702,68.804 ; v6@122.675,75.559 v6(122.702,75.586) ; v3@263.009,68.696 v3@263.035,68.669 ; v6@263.009,75.425 v6(263.035,75.452)
  Bottom Layer w0.8: v3@122.675,68.83 v6@122.675,75.559 ; v3@263.009,68.696 v6@263.009,75.425
  other v3: 262.982,68.616 122.649,68.75
DIG_RES0: J33.35 P66.1 U39.2 | length 55.2
  Top Layer w0.15: P66.1@208.218,18.446 208.218,25.164 v1(208.213,25.169) 208.215,25.171 209.36,25.171 U39.2@209.362,25.173
  Layer 1 w0.15: v2(239.245,35.507) 239.254,35.516 239.254,42.912 J33.35@240.744,44.403
  Layer 2 w0.15: v1(208.213,25.169) 208.213,29.414 211.799,33 236.738,33 v2(239.245,35.507)
DIG_RES0_EXT: J34.D09 P66.2 U26.11 U39.4 | length 278.4
  Top Layer w0.15: P66.2@211.432,18.706 211.432,24.303 ; v1(211.514,22.298) 211.514,24.166 211.405,24.276 211.432,24.303 ; U39.4@211.851,24.523 U39.4@211.652,24.523 ; 211.432,24.303 U39.4@211.652,24.523 ; 211.432,24.303 211.432,24.511 U39.4@211.444,24.523 U39.4@211.652,24.523
  Layer 1 w0.15: v2(102.468,16.442) 102.811,16.099 106.589,16.099 108.2,14.488 v2(211.173,14.488) ; v2(211.173,14.488) v2@267.439,14.487
  Layer 2 w0.15: U26.11@93.385,25.89 93.385,25.525 v2(102.468,16.442) ; v2(211.173,14.488) 211.173,18.47 211.112,18.531 P66.2@211.287,18.706 ; v2(267.44,14.486) 267.881,14.486 302.862,49.468 v2(338.109,49.468)
  Bottom Layer w0.15: v2(338.109,49.468) 338.123,49.482 339.461,49.482 J34.D09@339.476,49.496
DIG_RES1: J33.38 P67.1 U40.2 | length 48.7
  Top Layer w0.15: P67.1@217.94,18.791 217.382,19.348 v1(217.382,25.179) 217.384,25.182 218.529,25.182 U40.2@218.531,25.183
  Layer 1 w0.15: v2(241.419,35.501) 242.234,36.316 242.234,43.353 J33.38@243.284,44.403
  Layer 2 w0.15: v1(217.382,25.179) 217.382,30.256 219.784,32.659 238.577,32.659 v2(241.419,35.501)
DIG_RES1_EXT: J34.D11 P67.2 U26.12 U40.4 | length 271.4
  Top Layer w0.15: P67.2@220.48,18.791 220.48,24.431 220.582,24.534 U40.4@220.613,24.534
  Layer 1 w0.15: v2(104.218,16.722) 106.389,16.722 108.261,14.851 159.315,14.851 159.766,15.301 220.454,15.301 v2(220.513,15.242) 220.576,15.306 267.419,15.306 v2(267.483,15.37) ; v2(297.698,45.33) 336.843,45.33 v2(338.048,46.536)
  Layer 2 w0.15: U26.12@95.925,25.89 95.925,25.015 v2(104.218,16.722) ; P67.2@220.48,18.791 220.513,18.758 v2(220.513,15.242) ; v2(267.483,15.37) 297.376,45.263 297.631,45.263 v2(297.698,45.33)
  Bottom Layer w0.15: v2(338.048,46.536) 338.426,46.914 339.434,46.914 J34.D11@339.476,46.956
DIG_RES2: J33.41 P68.1 U41.2 | length 42.8
  Top Layer w0.15: P68.1@226.703,18.612 226.23,19.086 v1(226.23,25.119) 226.232,25.12 227.376,25.12 U41.2@227.378,25.122
  Layer 1 w0.15: v2(244.491,35.729) 244.491,43.07 J33.41@245.824,44.403
  Layer 2 w0.15: v1(226.23,25.119) 226.23,30.12 228.421,32.311 241.359,32.311 244.491,35.444 v2(244.491,35.729)
DIG_RES2_EXT: J34.D12 P68.2 U26.13 U41.4 | length 275.5
  Top Layer w0.15: P68.2@229.243,18.612 229.243,24.37 229.346,24.472 U41.4@229.461,24.472
  Layer 1 w0.15: U26.13@95.925,10.65 97.696,8.879 162.98,8.879 163.075,8.973 v2(229.066,8.973) 229.088,8.951 v2@271.978,8.951 ; v2(272.003,9.156) 272.003,8.976 v2@271.978,8.951 ; v2@272.026,8.951 v2@271.978,8.951 ; v2(298.093,34.655) 308.101,44.664 337.101,44.664 v2(338.156,45.719)
  Layer 2 w0.15: v2(229.066,8.973) 229.133,9.04 229.133,18.501 P68.2@229.243,18.612 ; v2(272.003,9.156) 272.594,9.156 v2(298.093,34.655)
  Bottom Layer w0.15: v2(338.156,45.719) 338.173,45.703 339.459,45.703 J34.D12@339.476,45.686
DIG_RES3: J33.44 P69.1 U42.2 | length 36.3
  Top Layer w0.15: P69.1@236.015,18.598 235.34,19.273 235.34,24.718 235.158,24.9 v1(235.158,25.089) 235.161,25.091 236.305,25.091 U42.2@236.307,25.093
  Layer 1 w0.15: v2(246.839,35.562) 246.874,35.597 246.874,42.912 J33.44@248.364,44.403
  Layer 2 w0.15: v1(235.158,25.089) 235.158,29.894 237.276,32.012 243.288,32.012 v2(246.839,35.562)
DIG_RES3_EXT: J34.D14 P69.2 U26.14 U42.4 | length 279.2
  Top Layer w0.15: U42.4@238.39,24.443 238.588,24.443 238.62,24.411 v1(238.62,23.292) ; P69.2@238.555,18.598 238.555,23.292 U42.4@238.555,24.411 ; U42.4@238.62,24.443 U42.4@238.796,24.443
  Layer 1 w0.15: U26.14@93.385,10.65 95.688,8.347 238.462,8.347 238.757,8.641 255.82,8.641 255.883,8.578 v2(273.042,8.578) ; v2(300.012,34.693) 308.52,43.201 v2(338.13,43.201)
  Layer 2 w0.15: v2(238.381,8.347) 238.447,8.413 238.447,18.49 P69.2@238.555,18.598 ; v2(273.042,8.578) 273.897,8.578 v2(300.012,34.693)
  Bottom Layer w0.15: v2(338.13,43.201) 338.158,43.173 339.448,43.173 J34.D14@339.476,43.146
FPGA_3P3V: J34.C39 P82.1 | length 24
  Bottom Layer w0.15: P82.1@318.148,13.786 318.723,13.211 339.701,13.211 340.176,12.735 340.176,11.965 J34.C39@340.746,11.396
FPGA_12V: J34.C35 P81.1 | length 36.7
  Bottom Layer w0.15: P81.1@306.568,20.257 306.775,20.05 317.439,20.05 320.66,16.829 320.66,16.796 322.106,15.351 333.77,15.351 334.17,15.751 340.021,15.751 J34.C35@340.746,16.476
FPGA_TEST0: J34.H07 P80.1 | length 15.8
  Bottom Layer w0.15: P80.1@318.599,52.058 318.622,52.036 J34.H07@334.396,52.036
FPGA_VADJ: J34.G39 P88.1 | length 18.8
  Bottom Layer w0.15: P88.1@321.125,2.155 325.941,6.972 332.012,6.972 334.941,9.9 334.941,10.671 J34.G39@335.666,11.396
GAIN_HI: J33.32 J34.D08 U26.10 | length 286.5
  Layer 1 w0.15: v2(98.194,17.207) 98.321,17.334 117.883,17.334 133.469,32.919 228.206,32.919 v2(228.824,33.538) 236.714,41.428 236.714,42.913 J33.32@238.204,44.403
  Layer 2 w0.15: U26.10@90.845,25.89 90.845,24.555 v2(98.194,17.207) ; v2(278.379,27.753) 279.152,27.753 302.02,50.621 v2(338.082,50.621)
  Bottom Layer w0.15: v2(228.824,33.538) 229.421,32.941 266.523,32.941 271.711,27.753 v2(278.379,27.753) ; v2(338.082,50.621) 338.149,50.688 339.398,50.688 J34.D08@339.476,50.766